# Altium PCB ArduinoUnoR3.PcbDoc
Units mm, origin at the board's own origin, x right, y up, seen from the top; angles counter-clockwise.
Board outline 97.25 x 59.77 mm, 2 copper layers (Top Layer, Bottom Layer); 51 components, 48 nets, 190 pads, 36 vias.
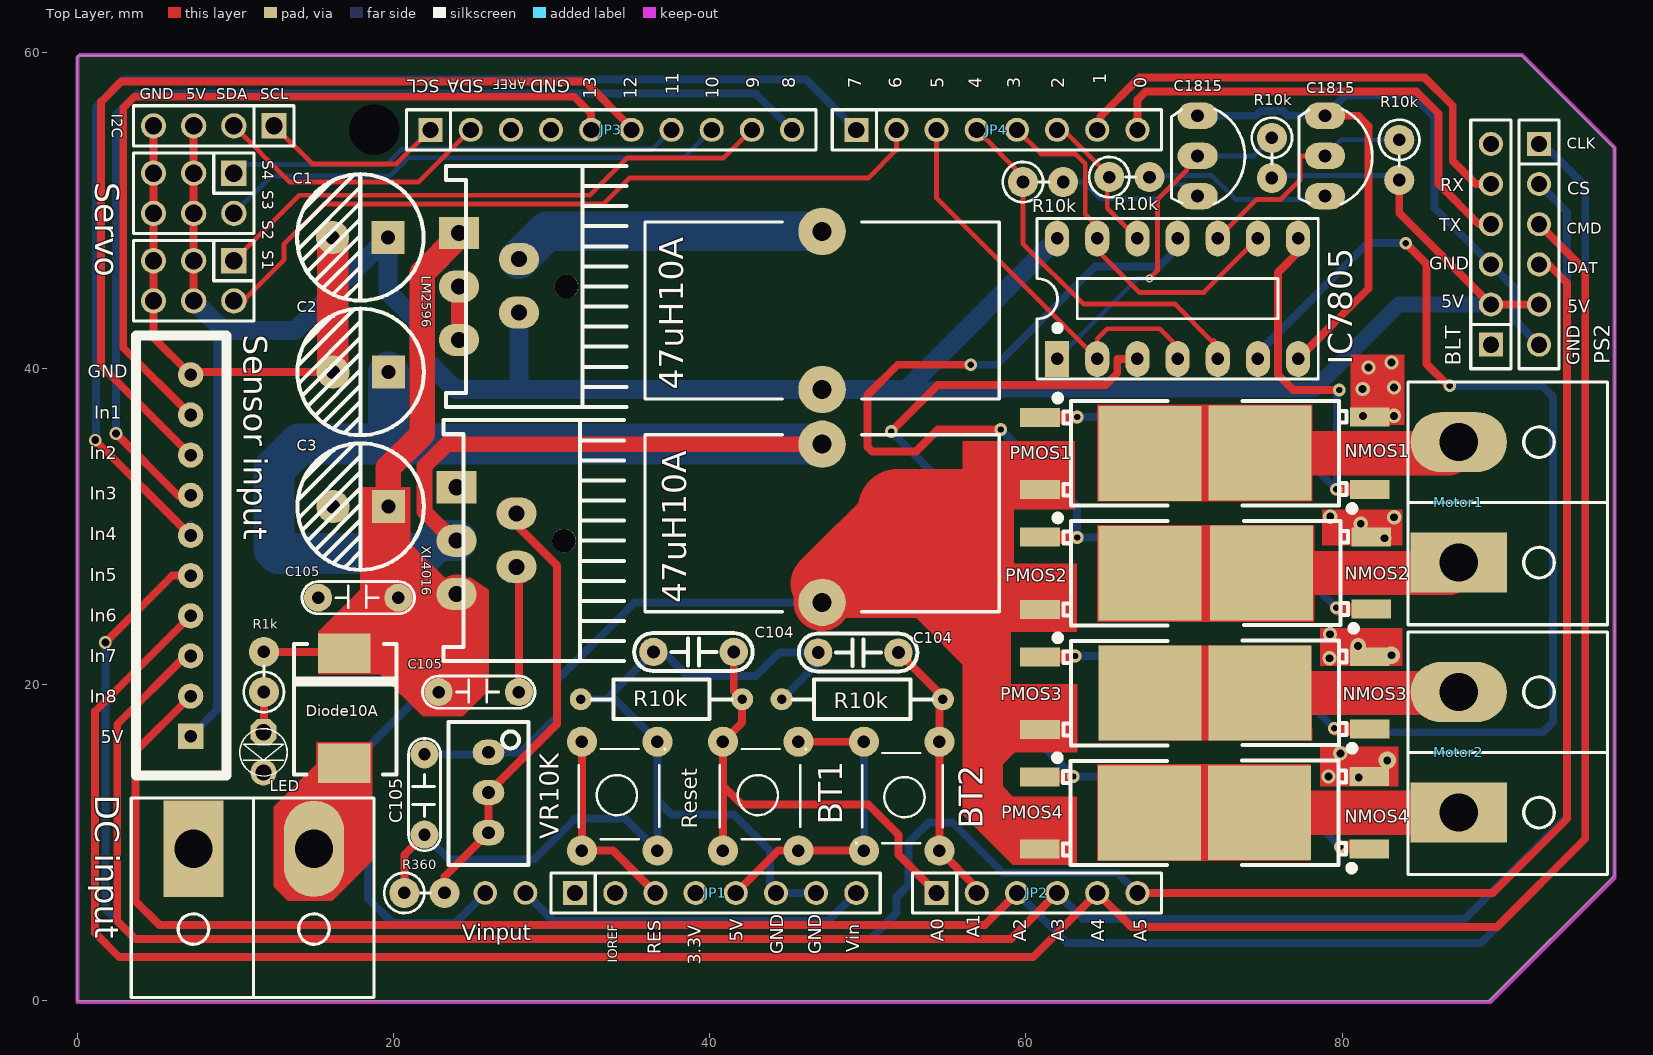
[diagram p0: Top Layer view]
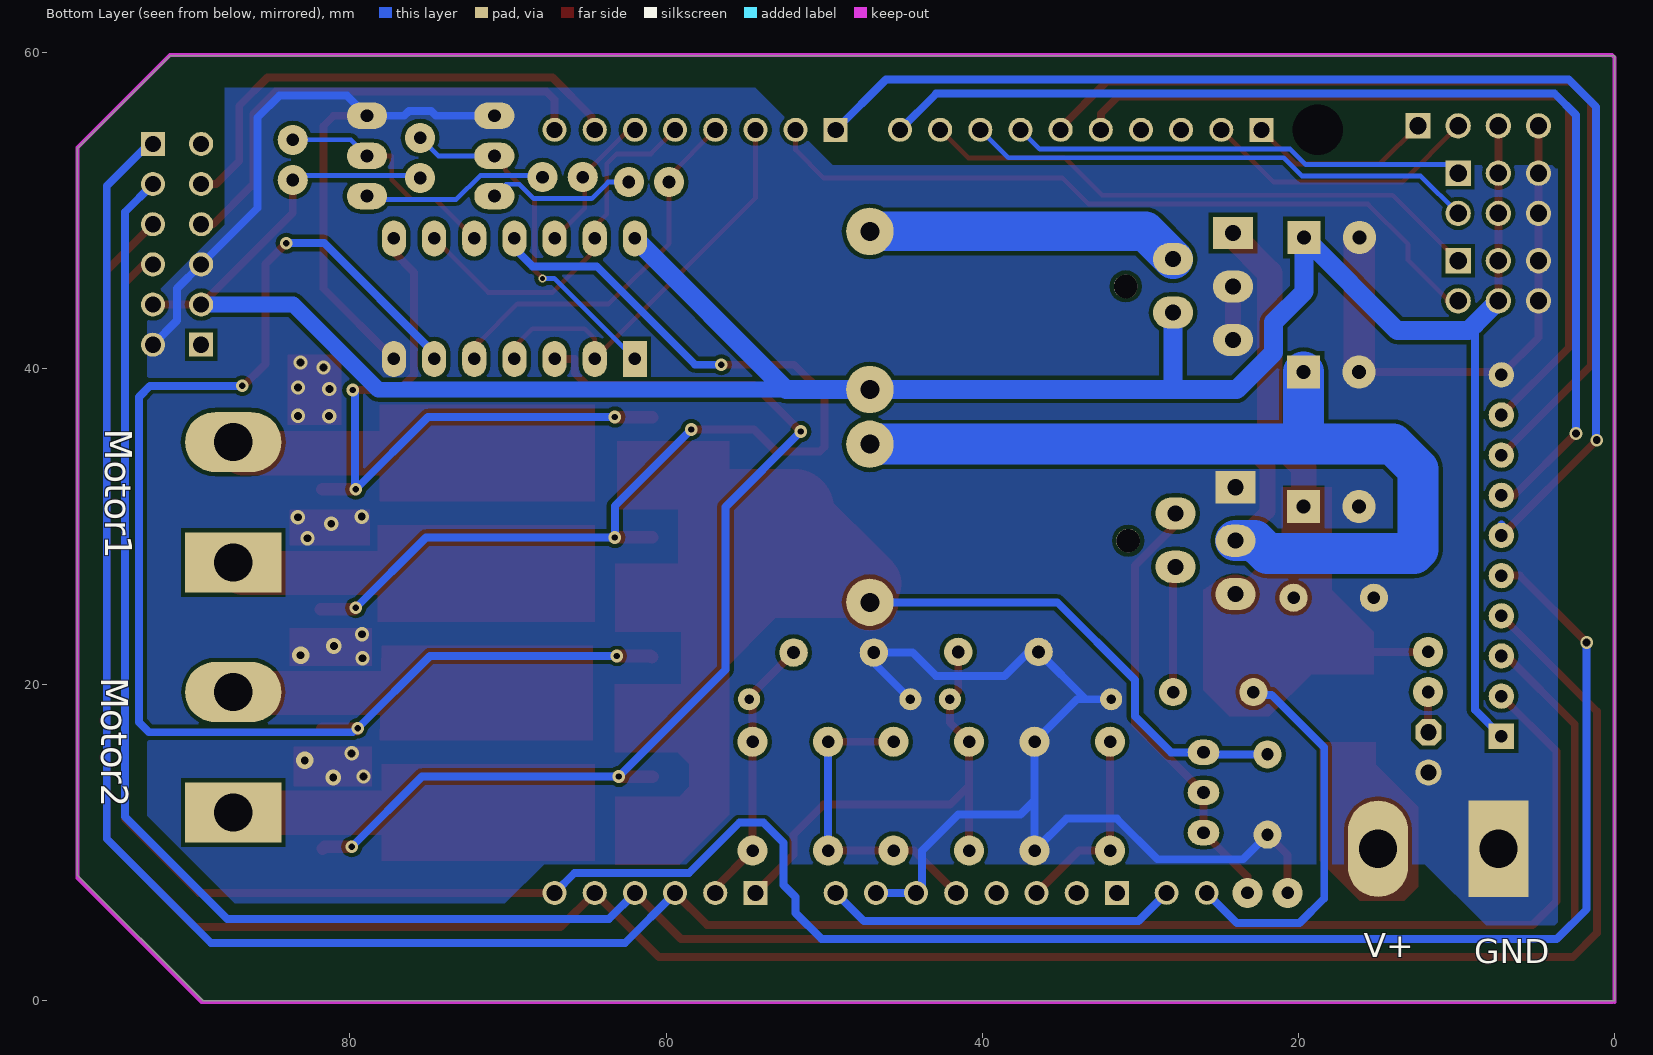
[diagram p1: Bottom Layer view, seen from below]
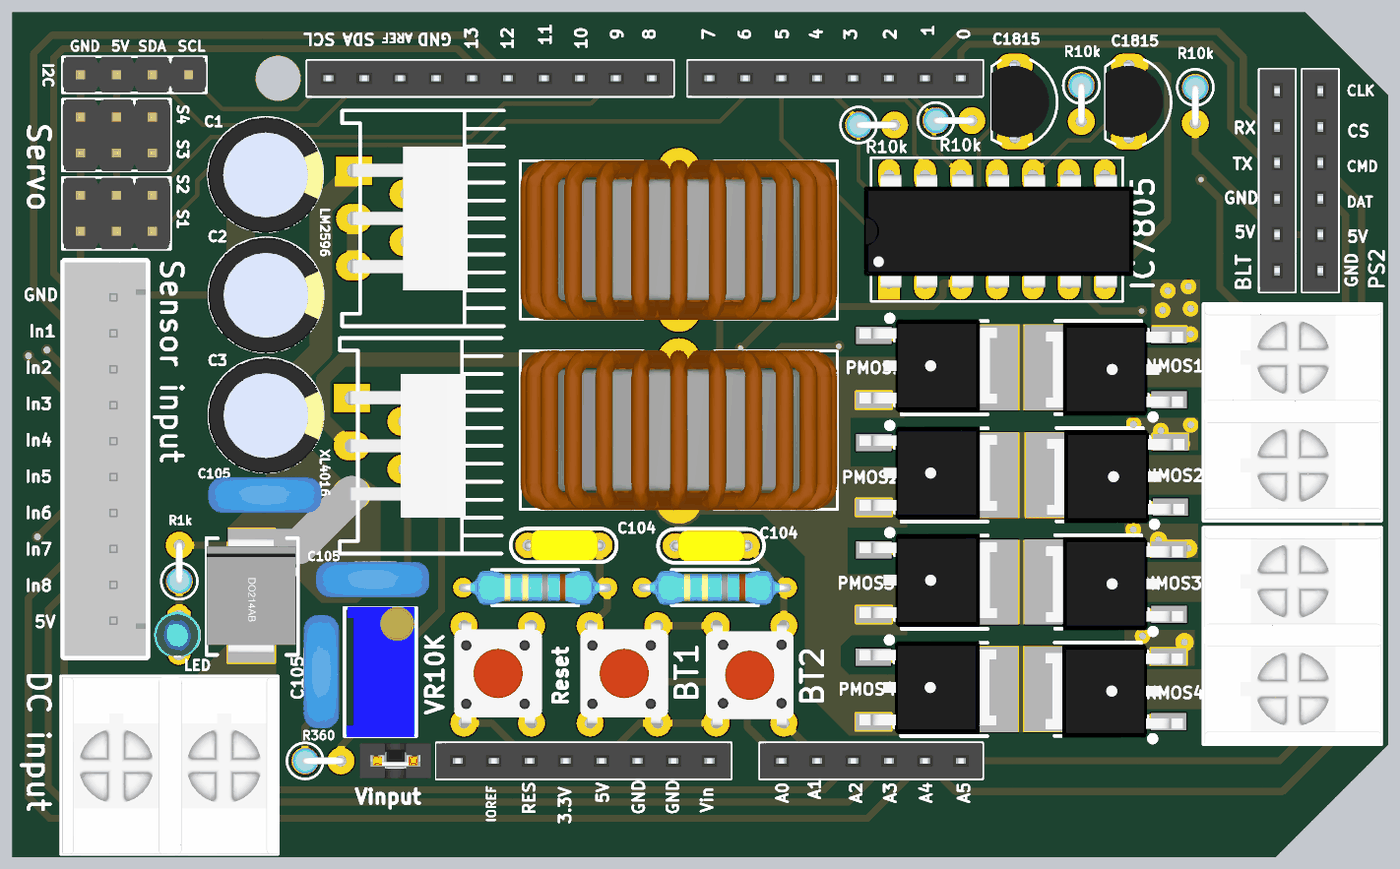
[diagram p2: 3D render of the assembled board from above, using the file's embedded part models]

## Layer stack, top to bottom
Top Solder: solder mask 0.0102, Solder Resist, Dk 3.5
Top Layer: signal copper 0.0356
Dielectric 1: dielectric 0.32, FR-4, Dk 4.8
Bottom Layer: signal copper 0.0356
Bottom Solder: solder mask 0.0102, Solder Resist, Dk 3.5

## Board outline
-0.001,0.007 89.275,0.007 97.252,7.984 97.252,53.894 91.372,59.774 -0.001,59.774

## Design rules (kind name [scope] priority, off if disabled: settings)
Clearance Clearance_1 [All] p1: gap=0.254 ignorepadtopadclearanceinfootprint=FALSE except(0: Arc-Text Arc-Hole Track-Text Track-Hole SMDPad-Text SMDPad-Hole THPad-Text THPad-Hole Via-Text Via-Hole Fill-Text Fill-Hole Poly-Text Poly-Hole Region-Text Region-Hole Text-Text Text-Hole)
Clearance [InNet('GND')] p2: gap=0.6 ignorepadtopadclearanceinfootprint=FALSE
HoleSize [All] p1: absolutevalues=TRUE maxlimit=5 minlimit=0.025 maxpercent=80.000 minpercent=20.000
PlaneClearance [All] p1: clearance=0.8
PlaneConnect [All] p1: planeconnectstyle=Direct reliefexpansion=0.508 reliefentries=4 reliefconductorwidth=0.254 reliefairgap=0.254
PolygonConnect [All] p1: thpad.connectstyle=Direct thpad.reliefconductorwidth=0.254 thpad.reliefentries=4 thpad.polygonreliefangle="90 Angle" thpad.airgapwidth=0.254 smdpad.connectstyle=Relief smdpad.reliefconductorwidth=0.254 smdpad.reliefentries=4 smdpad.polygonreliefangle="90 Angle" smdpad.airgapwidth=0.254 via.connectstyle=Direct via.reliefconductorwidth=0.254 via.reliefentries=4 via.polygonreliefangle="90 Angle" via.airgapwidth=0.254
RoutingVias [All] p1: holewidth=0.4 width=0.7 viastyle="Through Hole" minholewidth=0.3 minwidth=0.5 maxholewidth=0.5 maxwidth=1.27
SilkToSilkClearance [All] p1 off: silktosilkclearance=0.254
SilkToSolderMaskClearance [IsPad] p1 off: minsilkscreentomaskgap=0.254 clearancetoexposedcopper=TRUE
SolderMaskExpansion [All] p1: expansion=0.102 istentingtop=FALSE
Width [All] p1: maxlimit=5 minlimit=0.3 preferedwidth=1
25 further rules are at their usual default settings.

## Classes and differential pairs
component class Sheet1: 47uH10A BLT BT1 BT2 C1 C2 C3 "DC input" I2C JP1 JP2 JP3 JP4 LED LM2596 Motor1 Motor2 PS2 Reset "Sensor input" Servo Vinput XL4016

## Components (designator, comment, footprint, x,y, rotation, side; value= is the part's Value field where it differs from the comment)
47uH10A "47uH 10x20mm (10A)" IND-20x10mm_TH 47.116,48.667 r270 top value=33uH (schematic designator L2)
47uH10A "47uH 10x20mm (10A)" IND-20x10mm_TH 47.116,35.21 r270 top value=33uH (schematic designator L1)
BLT "JP 1x6 2.54" "JP 1x6 CT" 89.407,41.503 r90 top
BT1 "BT" SW4 40.639,9.84 r90 top (schematic designator Button2)
BT2 "BT" SW4 54.736,16.063 r270 top (schematic designator Button1)
C1 "8mm220uf35v" "tu hoa 8mm" 17.906,48.285 r180 top (schematic designator C8)
C2 "8mm220uf35v" "tu hoa 8mm" 17.934,39.777 r180 top (schematic designator C5)
C3 "8mm22uf35v" "tu hoa 8mm" 17.934,31.269 r180 top (schematic designator C7)
C104 "100nF" "tu tantalum dip5.08" 38.988,22.072 r180 top (schematic designator C2)
C104 "100nF" "tu tantalum dip5.08" 49.402,22.032 r180 top (schematic designator C1)
C105 "105" CN2 15.239,25.501 r0 top value=0.1uF (schematic designator C6)
C105 "105" CN2 21.97,10.515 r90 top value=0.1uF (schematic designator C4)
C105 "105" CN2 22.859,19.532 r0 top value=0.1uF (schematic designator C3)
C1815 "C1815" QTO-92 70.865,53.441 r270 top (schematic designator Q2)
C1815 "C1815" QTO-92 78.92,53.441 r270 top (schematic designator Q1)
"DC input" "CON 2 KF7.62" "CON 2 KF7.62" 7.405,9.626 r0 top
Diode10A "DO214ABSMC 10A" DIODE_DO214AB_SMC 16.892,18.516 r90 top value=40V/5A (schematic designator D1)
I2C "JP 1x4 2.54" "JP 1x4 DT" 12.451,55.342 r180 top (schematic designator "I2C input")
IC7805 "7408" DIP14/W0.3 61.975,40.601 r0 top (schematic designator IC1)
JP1 "power" "JP 1x8 CT" 31.495,6.832 r0 top locked
JP2 "Analog pin" "JP 1x6 CT" 54.355,6.832 r0 top locked
JP3 "Digital 2" "JP 1x10 CT" 22.351,55.092 r0 top locked
JP4 "Digital 1" "JP 1x8 CT" 49.275,55.092 r0 top locked
LED "LED 3mm" LED-3MM-GREEN 11.787,16.992 r270 top (schematic designator Led2)
LM2596 "LM2576T-5.0" LM2576t 28.397,45.211 r270 top (schematic designator U2)
Motor1 "CON 2 KF7.62" "CON 2 KF7.62" 87.375,27.772 r90 top
Motor2 "CON 2 KF7.62" "CON 2 KF7.62" 87.375,11.963 r90 top
NMOS1 "IRLR2908" TO-252-3_L6.6-W6.1-P4.57-LS9.9-BR-CW 77.277,34.508 r0 top (schematic designator N-mosfet1)
NMOS2 "IRLR2908" TO-252-3_L6.6-W6.1-P4.57-LS9.9-BR-CW 77.377,26.927 r0 top (schematic designator N-mosfet2)
NMOS3 "IRLR2908" TO-252-3_L6.6-W6.1-P4.57-LS9.9-BR-CW 77.277,19.346 r0 top (schematic designator N-mosfet4)
NMOS4 "IRLR2908" TO-252-3_L6.6-W6.1-P4.57-LS9.9-BR-CW 77.25,11.764 r0 top (schematic designator N-mosfet3)
PMOS1 "STD10PF06" TO-252-3_L6.6-W6.1-P4.57-LS9.9-BR-CW 65.37,34.763 r180 top (schematic designator P-mosfet1)
PMOS2 "STD10PF06" TO-252-3_L6.6-W6.1-P4.57-LS9.9-BR-CW 65.37,27.182 r180 top (schematic designator P-mosfet2)
PMOS3 "STD10PF06" TO-252-3_L6.6-W6.1-P4.57-LS9.9-BR-CW 65.37,19.601 r180 top (schematic designator P-mosfet4)
PMOS4 "STD10PF06" TO-252-3_L6.6-W6.1-P4.57-LS9.9-BR-CW 65.342,12.019 r180 top (schematic designator P-mosfet3)
PS2 "JP 1x6 2.54" "JP 1x6 CT" 92.455,54.203 r270 top (schematic designator PS1)
R1k "10k" R1/4W1 11.81,19.538 r90 top value="R1/4W - 1K" (schematic designator R10)
R10k "10k" R1/4W1 65.277,52.102 r0 top value="R1/4W - 1K" (schematic designator R8)
R10k "10k" R1/4W1 59.816,51.79 r0 top value="R1/4W - 1K" (schematic designator R9)
R10k "10k" R1/4W1 83.614,54.457 r270 top value="R1/4W - 1K" (schematic designator R6)
R10k "10k" R1/4W1 75.56,54.584 r270 top value="R1/4W - 1K" (schematic designator R4)
R10k "10k" "tro vach 1/4w" 36.956,19.079 r0 top (schematic designator R2)
R10k "10k" "tro vach 1/4w" 49.656,19.079 r0 top (schematic designator R1)
R360 "360R" R1/4W1 20.693,6.832 r0 top (schematic designator R7)
Reset "BT" SW4 31.724,9.84 r90 top (schematic designator ButtonReset)
"S4  S3  S2  S1" "" "JP 2x3 DT" 7.371,51.078 r180 top (schematic designator "Servo Output1")
"Sensor input" "Header 10P 2.54 Duc Thang" XH2.54M-10 7.18,16.738 r90 top
Servo "" "JP 2x3 DT" 7.371,45.543 r180 top (schematic designator "Servo Output")
Vinput "Jumper" Jumper 28.351,6.832 r180 top
VR10K "10K" "Bien Tro Vi Chinh Dung" 26.015,13.182 r270 top (schematic designator T1)
XL4016 "XL4016" LM2576t 28.243,29.133 r270 top (schematic designator U1)

## Footprints (in the part's own frame and the unit in brackets; to place one, negate y for a bottom-side part, rotate by r counter-clockwise, add the part's x,y. Pads: shape width x height; smd on the part's side, far side on the other; paste and mask are expansions set on the pad)
"Bien Tro Vi Chinh Dung" [mm] "Bien tro vi chinh"
  oval 1.6x2 hole 0.8: 1(-2.54,0) 2(0,0) 3(2.54,0)
  silkscreen extent -4.47,-2.54 4.6,2.54, body extent -4.54,-2.4 4.66,2.4, height 12.02
CN2 [mil]
  round 70 hole 31: 1(0,0) 2(200,0)
  silkscreen extent -40,-40 240,40, body extent -54,-44 260,55, height 407
"CON 2 KF7.62" [mil]
  rect 150x240 hole 95: 1(-2,0)
  oval 150x240 hole 95: 2(298,0)
  silkscreen extent -157,-370 448,126, body extent -152,-370 448,122, height 493
DIODE_DO214AB_SMC [mm] "DIODE_DO214AB_SMC Type"
  rect 2.5x3.3 smd: 1(-3.498,0) 2(3.473,0)
  silkscreen extent -4.19,-3.3 4.06,3.18, body extent -4.06,-3.15 4.06,3.15, height 2.67
DIP14/W0.3 [mil] "14PIN, W 300mil, Pin to pin 100mil"
  rect 60x90 hole 31: 1(0,0)
  oval 60x90 hole 31: 2(100,0) 3(200,0) 4(300,0) 5(400,0) 6(500,0) 7(600,0) 8(600,300) 9(500,300) 10(400,300) 11(300,300) 12(200,300) 13(100,300) 14(0,300)
  silkscreen extent -50,-50 650,350, body extent -70,-12 680,302, height 145
IND-20x10mm_TH [mm]
  round 3 hole 1.2: 1(0,0) 2(10,0)
  silkscreen extent -0.6,-11.2 10.6,11.2, body extent -0.66,-11.21 10.66,11.21, height 23.04
"JP 1x4 DT" [mm] "4 pins, 1 row, straight, gold plating"
  rect 1.6x1.6 hole 1.1: 1(0,0)
  round 1.6 hole 1.1: 2(2.54,0) 3(5.08,0) 4(7.62,0)
  silkscreen extent -1.27,-1.27 8.89,1.27, body extent -1.27,-1.27 8.89,1.27, height 8.54
"JP 1x6 CT" [mm] "6 row, straight, gold plating"
  rect 1.52x1.52 hole 1.02: 1(0,0)
  round 1.52 hole 1.02: 2(2.54,0) 3(5.08,0) 4(7.62,0) 5(10.16,0) 6(12.7,0)
  silkscreen extent -1.52,-1.27 14.22,1.27, body extent -1.52,-1.25 14.22,1.25, height 8.51
"JP 1x8 CT" [mm] "8 row, straight, gold plating"
  rect 1.52x1.52 hole 1.02: 1(0,0)
  round 1.52 hole 1.02: 2(2.54,0) 3(5.08,0) 4(7.62,0) 5(10.16,0) 6(12.7,0) 7(15.24,0) 8(17.78,0)
  silkscreen extent -1.52,-1.27 19.3,1.27, body extent -1.52,-1.25 19.3,1.25, height 8.51
"JP 1x10 CT" [mm] "10 row, straight, gold plating"
  rect 1.52x1.52 hole 1.02: 1(0,0)
  round 1.52 hole 1.02: 2(2.54,0) 3(5.08,0) 4(7.62,0) 5(10.16,0) 6(12.7,0) 7(15.24,0) 8(17.78,0) 9(20.32,0) 10(22.86,0)
  silkscreen extent -1.52,-1.27 24.38,1.27, body extent -1.52,-1.25 24.38,1.25, height 8.51
"JP 2x3 DT" [mm]
  rect 1.6x1.6 hole 1.1: 1(-2.54,-1.27)
  round 1.6 hole 1.1: 2(0,-1.27) 3(2.54,-1.27) 4(2.54,1.27) 5(0,1.27) 6(-2.54,1.27)
  silkscreen extent -3.81,-2.54 3.81,2.54, body extent -3.81,-2.54 3.81,2.54, height 8.55
Jumper [mm]
  round 1.5 hole 1: 1(0,0) 2(2.54,0)
  body extent -1.27,-1.27 3.81,1.27, height 8.89
LED-3MM-GREEN [mil]
  oct 65x65 hole 40: 1(0,0)
  round 65 hole 40: 2(100,0)
  silkscreen extent -9,-59 109,59, body extent -15,-70 112,60, height 182
LM2576t [mil]
  rect 80x100 hole 40: 1(-132,-167.09)
  oval 80x100 hole 40: 2(-67,-18) 3(1,-167) 4(66,-18) 5(134,-167)
  round 59.06 hole 59.06: ""(1,100)
  silkscreen extent -299,-200 301,250, body extent -199,-175 201,150, height 859
QTO-92 [mil] "TO-92"
  oval 66x100 hole 32: 1(-100,0) 2(0,0) 3(100,0)
  silkscreen extent -117,-65 120,118, body extent -109,-66 109,95, height 245
R1/4W1 [mm] "R 1/4W, 2 Pin, 150mil"
  round 1.905 hole 0.8: 1(0,0) 2(2.54,0)
  silkscreen extent -1.28,-1.28 1.65,1.27, body extent -0.89,-0.92 2.82,0.92, height 7.3
SW4 [mil] "SW button 4pin, 250 x250 mil"
  round 75 hole 31: 1(-13,-8) 1(258,-8) 2(-13,-196) 2(258,-196)
  silkscreen extent 15,-215 240,0, body extent -31,-225 281,19, height 276
TO-252-3_L6.6-W6.1-P4.57-LS9.9-BR-CW [mm]
  rect 2.5x1.2 smd: 1(4.475,-2.149) 3(4.475,2.423)
  rect 6.5x6 smd: 2(-2.475,0.137)
  silkscreen extent -3.57,-3.56 3.55,3.44, body extent -4.23,-3.29 5.47,3.29, height 2.32
"tro vach 1/4w" [mm]
  round 1.4 hole 0.6: 1(-5.1,0) 2(5.1,0)
  silkscreen extent -4.39,-1.25 4.42,1.25, body extent -5.38,-1.2 5.38,1.2, height 2.41
"tu hoa 8mm" [mm]
  rect 2.1x2.1 hole 0.9: 1(-1.75,0)
  round 2.1 hole 0.9: 2(1.75,0)
  silkscreen extent -4,-4 4,4, body extent -4.1,-4.07 4.1,4.13, height 13.81
"tu tantalum dip5.08" [mm]
  round 1.8 hole 0.8: 1(-2.54,0) 2(2.54,0)
  silkscreen extent -3.74,-1.2 3.76,1.2, body extent -2.82,-1.08 2.77,1.08, height 6.27
XH2.54M-10 [mm]
  rect 1.6x1.6 hole 0.8: 1(0,0)
  round 1.6 hole 0.8: 2(2.54,0) 3(5.08,0) 4(7.62,0) 5(10.16,0) 6(12.7,0) 7(15.24,0) 8(17.78,0) 9(20.32,0) 10(22.86,0)
  silkscreen extent -2.48,-2.26 25.34,3.46, body extent -2.48,-2.26 25.34,3.48, height 6.91

## Part data
47uH10A 47uH10A: library part IND_33uH_10A, "FIXED IND 33UH 10A 7 MOHM 20x10mm", Category=INDUCTOR, ComponentLink1Description="MFR Link", ComponentLink1URL=https://item.taobao.com/item.htm?spm=a230r.1.14.40.67d1582cjSsbUh&id=591345290045, MPN=IND_33uH_10A, PinCount=2
BLT: library part "JP 1x6 2.54 Cai Thang", "Cắm", Chung_Loai=Cắm, Don_Vi=Con, Ma_Hang=MH004006, Ten_Linh_Kien="Jump Đơn Cái 2.54MM 1x20P Thẳng"
BT1 BT2 Reset: library part BUTTON
C1 C2 C3: library part "Tu Hoa 1000uF 25V 13x21", "Cắm", Chung_Loai=Cắm, Don_Vi=Con, Ma_Hang=MH002315, So_Chan=2, Ten_Linh_Kien="Tụ Hóa 1000uF 25V 13x21MM"
C104 C104: library part "Tu tantalum 100nF 50V 20% DIP5.08", "Cắm", Chung_Loai=Cắm, Don_Vi=Con, Ma_Hang=MH003955, So_Chan=2, Ten_Linh_Kien="Tụ tantalum 104-100nF 50V 20% DIP5.08 (sứ vàng)(10PCS)"
C105 C105 C105: library part CN2, "Cap np 104 => 105pF"
C1815 C1815: "NPN 600mW, ECB"
"DC input" Motor1 Motor2 "Sensor input": "Cắm", Chung_Loai=Cắm, Don_Vi=Con
  "DC input" Motor1 Motor2: Ma_Hang=MH002053, Ten_Linh_Kien="CON 2 KF7.62-2P 7.62MM (Đen Thẳng)"
  "Sensor input": Ma_Hang=MH001286, Ten_Linh_Kien="Header 10P XH2.54-10P Đực Thẳng"
Diode10A: library part B540C-13-F, "DIODE SCHOTTKY 40V 5A SMC", CompanyID=VT-00370, MPN=B540C-13-F, Solder=SMT
I2C: library part "JP 1x4 2.54 Duc Thang", "Cắm", Chung_Loai=Cắm, Don_Vi=Con, Ma_Hang=MH000903, Ten_Linh_Kien="Jump Đơn Đực 2.54MM 1x40P Thẳng 11MM"
IC7805: "Quad 2-Input AND Gate"
JP1 JP4: library part "JP 1x8 2.54 Duc Thang", "Cắm", Chung_Loai=Cắm, Don_Vi=Con, Ma_Hang=MH000903, Ten_Linh_Kien="Jump Đơn Đực 2.54MM 1x40P Thẳng 11MM"
JP2: library part "JP 1x6 2.54 Duc Thang", "Cắm", Chung_Loai=Cắm, Don_Vi=Con, Ma_Hang=MH000903, Ten_Linh_Kien="Jump Đơn Đực 2.54MM 1x40P Thẳng 11MM"
JP3: library part "JP 1x10 2.54 Duc Thang", "Cắm", Chung_Loai=Cắm, Don_Vi=Con, Ma_Hang=MH000903, Ten_Linh_Kien="Jump Đơn Đực 2.54MM 1x40P Thẳng 11MM"
LED: library part "LED 3mm Xanh La", "Cắm", Chung_Loai=Cắm, Don_Vi=Con, Ma_Hang=MH001054, Ten_Linh_Kien="Led 3MM Phủ Xanh (10c)"
LM2596: "SIMPLE SWITCHER; 3A Step-Down Voltage Regulator", DigiKeyPartNumber=LM2576T-5.0-ND, Manufacturer="National Semiconductor", PackageTopMarking="NSUZXYTT*LM2576T*-5.0 P+", PowerWise=N, Code_JEDEC=TO-220-AB, ComponentLink1Description="LM2576 Datasheet", ComponentLink1URL=http://www.national.com/ds/LM/LM2576.pdf, ComponentLink2Description="LM2576 Web Page", ComponentLink2URL=http://www.national.com/pf/LM/LM2576.html, ComponentLink3Description="T05A Package Page", ComponentLink3URL=http://www.national.com/packaging/folders/t05a.html, CompType=Switcher, DatasheetVersion=Aug-2004, FirstPublished=4-Dec-2008, PackageDescription="TO-220, Molded, 5 Lead, Straight", PackageReference=T05A, PackageVersion="revJ, Jan-1992", PartNumber=LM2576T-5.0, PinCount=5, Publisher="Altium Limited", RoHS=O
NMOS1 NMOS2 NMOS3 NMOS4: library part "IRF3709S SMD", "N-Channel Power MOSFET"
PMOS1 PMOS2 PMOS3 PMOS4: library part "AO D409", "P-Channel Power MOSFET", ComponentLink1Description="Manufacturer Link", ComponentLink1URL=http://www.irf.com/, ComponentLink2Description=Datasheet, ComponentLink2URL=http://www.irf.com/product-info/datasheets/data/irf9540.pdf, DatasheetVersion=PD-9.421C, LatestRevisionDate=17-Jul-2002, LatestRevisionNote="Re-released for DXP Platform.", Note="Pin 2 is electrically connected to pin 4.", PackageDescription="TO, Thru-Hole, Vertical, Heatsink Mounted; 3 In-Line Leads; Pitch 2.54 mm", PackageReference=TO-220AB, PackageVersion=Feb-1997, Published=8-Jun-2000, Publisher="Altium Limited"
PS2: library part "JP 1x6 2.54 Cai Cong", "Cắm", Chung_Loai=Cắm, Don_Vi=Con, Ma_Hang=MH001265, Ten_Linh_Kien="Jump Đơn Cái 2.54MM 1x40P Cong"
R1k R10k R10k R10k R10k: library part R1/4W, "Resistor 1/4W"
R10k R10k: library part "Tro Vach 1/4W 5% 10k", "Căm", Chung_Loai=Cắm, Don_Vi=Con, Ma_Hang=MH007354, So_Chan=2, Ten_Linh_Kien="Trở Vạch 1/4w 5% 10K"
R360: library part "Tro Vach 1/4W 1% 360R", "Cắm", Chung_Loai=Cắm, Don_Vi=Con, Ma_Hang=MH008835, So_Chan=2, Ten_Linh_Kien="Trở Vạch 1/4W 1% 360R"
"S4  S3  S2  S1" Servo: library part "JP 2x3 2.54 Duc Thang", "Cắm", Chung_Loai=Cắm, Don_Vi=Con, Ma_Hang=MH002686, Ten_Linh_Kien="Jump Đôi Đực 2.54MM 2x40P Thẳng 11MM"
Vinput: library part CMP-002-00080-4, "Oreki", Component Type=Connectors, Pins=2
VR10K: library part "Bien Tro Tinh Chinh 10K Dung", "Cắm", Chung_Loai=Cắm, Don_Vi=Con, Ma_Hang=MH003232, Ten_Linh_Kien="Biến Trở VR 103-10K 3296W"
XL4016: library part LM2576T-5.0, "SIMPLE SWITCHER; 3A Step-Down Voltage Regulator", DigiKeyPartNumber=LM2576T-5.0-ND, Manufacturer="National Semiconductor", PackageTopMarking="NSUZXYTT*LM2576T*-5.0 P+", PowerWise=N, Code_JEDEC=TO-220-AB, ComponentLink1Description="LM2576 Datasheet", ComponentLink1URL=http://www.national.com/ds/LM/LM2576.pdf, ComponentLink2Description="LM2576 Web Page", ComponentLink2URL=http://www.national.com/pf/LM/LM2576.html, ComponentLink3Description="T05A Package Page", ComponentLink3URL=http://www.national.com/packaging/folders/t05a.html, CompType=Switcher, DatasheetVersion=Aug-2004, FirstPublished=4-Dec-2008, PackageDescription="TO-220, Molded, 5 Lead, Straight", PackageReference=T05A, PackageVersion="revJ, Jan-1992", PartNumber=LM2576T-5.0, PinCount=5, Publisher="Altium Limited", RoHS=O

## Free pads (board coordinates)
  round 1.524 hole 3.175: 3(18.795,55.092)

## Via types
v1: diameter 0.9, hole 0.5, Top Layer to Bottom Layer, 14 vias
v2: diameter 0.8, hole 0.4, Top Layer to Bottom Layer, tented both sides, 14 vias
v3: diameter 0.8, hole 0.5, Top Layer to Bottom Layer, tented both sides, 3 vias
v4: diameter 1, hole 0.5, Top Layer to Bottom Layer, 2 vias
v5: diameter 1.1, hole 0.5, Top Layer to Bottom Layer, 2 vias
v6: diameter 0.5, hole 0.3, Top Layer to Bottom Layer, tented both sides, 1 vias

## Nets (pads, with @x,y where several pads share a name; then routed paths per layer and width w, separated by ;. In a path a pad name is that pad's centre, name@x,y a point inside that pad or via, vN(x,y) a via of type N, cw(c..) or ccw(c..) an arc to the next point about the centre after c; other vN are vias at no path point)
+5: BT1.2 BT2.2 JP1.5 | length 20.2
  Top Layer w0.5: JP1.5 44.334,9.51 45.618,9.51 BT2.2@49.758,9.51 ; BT1.2@45.618,16.393 BT2.2@49.758,16.393
  Bottom Layer w0.5: BT2.2@49.758,9.51 BT2.2@49.758,16.393
Button1: BT1.1 C104.1@41.528,22.072 JP2.1 R10k.2@42.056,19.079 | length 30.3
  Top Layer w0.5: BT1.1@40.843,9.51 40.843,13.614 ; C104.1@41.528,22.072 41.528,19.607 42.056,19.079 42.056,17.607 40.843,16.393 40.843,13.614 ; JP2.1 51.942,9.245 51.942,10.515 50.037,12.42 42.036,12.42 40.843,13.614
Button2: BT2.1 C104.1@51.942,22.032 JP2.2 R10k.2@54.756,19.079 | length 17.4
  Top Layer w0.5: C104.1@51.942,22.032 54.756,19.218 54.756,19.079 54.533,18.856 54.533,16.393 54.533,9.51 56.895,7.148 JP2.2
GND: "DC input.1" "S4  S3  S2  S1.3" "S4  S3  S2  S1.4" "Sensor input.10" BLT.3 C1.2 C2.2 C3.2 C104.2 C105.1@15.239,25.501 C105.1@21.97,10.515 C1815.1 I2C.4 IC7805.7 JP1.6 JP1.7 LED.2 LM2596.3 LM2596.5 NMOS1.3 NMOS2.3 NMOS3.3 NMOS4.3 PS2.6 R10k.1@31.856,19.079 R10k.1@44.556,19.079 R360.1 Reset.2 Servo.3 Servo.4 XL4016.1 | length 159
  Top Layer w0.5: I2C.4 4.831,52.348 4.831,49.808 Servo.3 Servo.4 4.831,41.946 7.18,39.598 7.359,39.777 C2.2 ; R360.1 20.693,9.237 C105.1@21.97,10.515 ; C104.2@36.448,22.072 C104.2@36.702,21.818 ; IC7805.7 81.66,45.046 81.66,55.346 81.025,55.981 C1815.1@78.92,55.981
  Top Layer w1: LM2596.5 LM2596.3
  Top Layer w2: C1.2 16.156,39.805 C2.2
  Bottom Layer w0.5: C105.1@21.97,10.515 23.522,8.963 28.928,8.963 31.495,11.531 34.682,11.531 36.702,9.51 36.702,12.674 ; R10k.1@31.856,19.079 33.456,19.079 ; R10k.1@44.556,19.079 46.862,21.385 46.862,22.032 44.41,22.032 42.925,20.548 38.607,20.548 37.083,22.072 36.448,22.072 33.456,19.079 ; JP1.7 JP1.6 43.814,7.213 43.814,9.499 41.528,11.785 37.591,11.785 36.702,12.674 ; C1815.1@70.865,55.981 74.55,55.981 74.855,56.286 76.265,56.286 76.571,55.981 78.92,55.981 80.19,57.251 84.454,57.251 85.851,55.854 85.851,50.139 BLT.3 90.931,45.059 90.931,43.027 PS2.6 ; 33.456,19.079 34.017,19.079 36.702,16.393 36.702,12.674
  other v1: 79.139,14.19 79.888,15.661 79.204,21.674 79.232,23.192 82.689,29.259 81.18,30.176 83.293,30.59 79.251,30.628 81.31,36.984 83.282,37.003 81.301,38.693 83.282,38.802 81.673,40.065 83.127,40.374
  other v4: 81.055,14.127 81.016,22.444
  other v5: 82.852,15.218 83.116,21.863
IN1A: IC7805.8 NMOS1.1 PMOS1.1 | length 42.5
  Top Layer w0.5: IC7805.8 77.215,47.345 75.941,46.071 75.941,39.602 76.907,38.636 v2(79.817,38.636)
  Top Layer w0.8: PMOS1.1 63.228,36.913 v2(63.245,36.931) ; v2(79.628,32.359) NMOS1.1
  Bottom Layer w0.5: v2(63.245,36.931) 75.056,36.931 v2(79.628,32.359) 79.686,32.416 79.686,38.424 79.817,38.555 v2(79.817,38.636)
IN1B: IC7805.11 NMOS2.1 PMOS2.1 | length 68.1
  Top Layer w0.5: v2(56.514,40.233) 51.899,40.233 49.991,38.325 49.991,35.044 50.284,34.751 53.052,34.751 54.442,36.141 v2(58.413,36.141)
  Top Layer w0.8: PMOS2.1 63.225,29.332 v2(63.245,29.311) ; v2(79.628,24.866) 79.717,24.777 NMOS2.1
  Bottom Layer w0.5: v2(56.514,40.233) 58.165,40.233 64.388,46.456 68.452,46.456 69.595,47.599 IC7805.11 ; v2(58.413,36.141) 63.245,31.308 v2(63.245,29.311) 75.183,29.311 v2(79.628,24.866)
IN2A: IC7805.3 NMOS4.1 PMOS4.1 | length 67.4
  Top Layer w0.5: v2(51.48,36.009) 54.425,38.954 65.04,38.954 65.781,39.695 65.781,40.601 IC7805.3
  Top Layer w0.8: PMOS4.1 62.963,14.169 v2(62.991,14.198) ; v2(79.882,9.753) 81.587,9.753 NMOS4.1
  Bottom Layer w0.5: v2(51.48,36.009) 56.246,31.243 56.246,20.943 v2(62.991,14.198) 75.437,14.198 v2(79.882,9.753)
IN2B: IC7805.6 NMOS3.1 PMOS3.1 | length 87.2
  Top Layer w0.5: v2(84.015,47.928) 85.344,46.599 85.344,40.286 86.729,38.901 v2(86.81,38.901)
  Top Layer w0.8: PMOS3.1 60.963,21.818 v2(63.118,21.818) ; v2(79.501,17.246) 79.551,17.196 NMOS3.1
  Bottom Layer w0.5: v2(63.118,21.818) 74.929,21.818 v2(79.501,17.246) 79.583,17.246 79.837,16.992 92.709,16.992 93.344,17.627 93.344,38.195 92.638,38.901 v2(86.81,38.901) ; IC7805.6 74.675,40.982 81.622,47.928 v2(84.015,47.928)
M1DIR: IC7805.12 JP4.6 R10k.1@65.277,52.102 | length 9.2
  Top Layer w0.3: JP4.6 62.378,55.092 65.15,52.319 65.15,52.102 65.15,50.126 IC7805.12
M1PWM: IC7805.9 IC7805.13 JP4.5 | length 23.7
  Top Layer w0.3: JP4.5 60.959,53.568 63.118,53.568 63.753,52.933 63.753,49.758 64.515,48.996 IC7805.13 64.515,47.472 67.182,44.805 71.259,44.805 IC7805.9
M2DIR: IC7805.5 JP4.4 R10k.1@59.816,51.79 | length 25.5
  Top Layer w0.3: JP4.4 59.816,52.171 59.816,51.79 59.816,47.895 63.633,44.078 69.416,44.078 71.823,41.671 71.823,41.626 72.135,41.313 IC7805.5 71.901,40.835 71.901,41.75 71.881,41.77
M2PWM: IC7805.2 IC7805.4 JP4.3 | length 26.9
  Top Layer w0.3: JP4.3 54.355,50.761 IC7805.2 64.515,41.884 65.15,42.519 68.452,42.519 69.595,41.376 IC7805.4
  Bottom Layer w0.3: JP4.3@54.122,54.858 JP4.3
NetBLT_4: BLT.4 JP4.8 | length 30.7
  Top Layer w0.5: JP4.8 67.055,56.997 67.563,57.505 84.708,57.505 86.105,56.108 86.105,51.663 88.645,49.123 BLT.4 BLT.4@89.28,48.996
NetBLT_5: BLT.5 JP4.7 | length 31.5
  Top Layer w0.5: JP4.7 64.711,55.287 64.711,55.922 67.182,58.394 85.216,58.394 86.994,56.616 86.994,53.126 88.458,51.663 BLT.5
NetButtonReset_1: JP1.3 Reset.1 | length 12.6
  Top Layer w0.5: Reset.1@31.927,16.393 31.927,9.51 33.897,9.51 JP1.3
NetC3_2: C105.2@27.939,19.532 XL4016.4 | length 8
  Top Layer w0.5: XL4016.4 27.939,27.303 C105.2@27.939,19.532
NetC5_1: 47uH10A.1@47.116,35.21 C2.1 XL4016.3 | length 88.3
  Top Layer w1: XL4016.3 23.825,29.108 21.975,30.958 21.975,33.814 23.371,35.21 47uH10A.1@47.116,35.21
  Bottom Layer w2.6: C2.1 19.684,35.21 ; XL4016.3 22.783,29.108 21.97,28.295 12.699,28.295 12.445,28.549 12.445,33.629 14.027,35.21 19.684,35.21 ; 47uH10A.1@47.116,35.21 19.684,35.21
NetD1_1: "DC input.2" Diode10A.1
"NetI2C input_1": I2C.1 JP3.1 | length 11.8
  Top Layer w0.3: I2C.1 14.86,52.933 20.192,52.933 JP3.1
"NetI2C input_2": I2C.2 JP3.2 | length 17.8
  Top Layer w0.3: I2C.2 13.463,51.79 21.589,51.79 JP3.2
NetIC1_1: C1815.2@70.865,53.441 IC7805.1 R10k.1@75.56,54.584 | length 22.2
  Top Layer w0.3: v6(67.817,45.694) 68.325,46.202 68.325,50.692 70.17,52.537 70.17,52.805 70.806,53.441 C1815.2@70.865,53.441
  Bottom Layer w0.3: IC7805.1 67.068,45.694 v6(67.817,45.694) ; C1815.2@70.865,53.441 74.417,53.441 R10k.1@75.56,54.584
NetIC1_10: C1815.2@78.92,53.441 IC7805.10 R10k.1@83.614,54.457 | length 15
  Top Layer w0.3: IC7805.10 74.602,50.687 76.122,50.687 77.355,51.921 77.355,53.441 C1815.2@78.92,53.441
  Bottom Layer w0.3: C1815.2@78.92,53.441 79.936,54.457 R10k.1@83.614,54.457
NetJP1_8: JP1.8 Vinput.1 | length 22.4
  Bottom Layer w0.5: Vinput.1 30.129,5.054 47.497,5.054 JP1.8
NetJP2_3: "Sensor input.2" JP2.3 PS2.1 | length 156.9
  Top Layer w0.5: 7.18,19.278 3.682,15.781 3.682,6.324 5.206,4.8 57.403,4.8 JP2.3
  Bottom Layer w0.5: JP2.3 62.61,3.657 88.772,3.657 95.376,10.261 95.376,51.536 92.709,54.203 PS2.1
NetJP2_4: "Sensor input.3" JP2.4 PS2.2 | length 156.4
  Top Layer w0.5: 7.18,21.818 6.857,21.818 2.539,17.5 2.539,5.054 3.682,3.911 59.054,3.911 JP2.4
  Bottom Layer w0.5: JP2.4 63.626,5.181 87.756,5.181 94.233,11.658 94.233,49.885 PS2.2
NetJP2_5: "Sensor input.4" JP2.5 PS2.3 | length 162.4
  Top Layer w0.5: 7.18,24.358 1.142,18.321 1.142,4.292 2.666,2.768 60.451,2.768 JP2.5 66.674,4.673 89.788,4.673 95.376,10.261 95.376,46.202 PS2.3
NetJP2_6: "Sensor input.5" JP2.6 PS2.4 | length 162.7
  Top Layer w0.5: v3(1.786,22.673) 6.01,26.898 7.18,26.898 ; JP2.6 89.534,6.832 94.233,11.531 94.233,45.392 93.043,46.583 PS2.4
  Bottom Layer w0.5: v3@1.786,22.58 1.786,5.807 3.682,3.911 50.164,3.911 51.815,5.562 51.815,6.578 52.577,7.34 52.577,10.007 53.847,11.277 55.371,11.277 58.546,8.102 65.785,8.102 JP2.6 ; 6.73,26.898 7.18,26.898
NetJP3_5: "Sensor input.9" JP3.5 | length 52.5
  Top Layer w0.5: 7.18,37.058 2.92,41.317 2.92,56.489 3.615,57.183 31.436,57.183 32.511,56.108 JP3.5
NetJP3_6: "Sensor input.8" JP3.6 | length 60.1
  Top Layer w0.5: 7.18,34.518 1.523,40.174 1.523,56.87 2.793,58.14 32.13,58.14 35.051,55.219 JP3.6
NetJP3_10: "Sensor input.7" JP3.10 | length 70.8
  Top Layer w0.5: v3(2.457,35.889) 6.369,31.978 7.18,31.978
  Bottom Layer w0.5: v3@2.457,36.042 2.457,56.026 3.809,57.378 42.925,57.378 JP3.10 ; 6.984,31.978 7.18,31.978
NetJP4_1: "Sensor input.6" JP4.1 | length 80.2
  Top Layer w0.5: v3(1.15,35.465) 7.177,29.438 7.18,29.438
  Bottom Layer w0.5: v3@1.185,35.696 1.185,56.532 2.92,58.267 46.1,58.267 JP4.1 ; 7.18,29.438 7.18,30.132
NetL2_1: 47uH10A.1@47.116,48.667 LM2596.2 | length 19.9
  Bottom Layer w2.5: LM2596.2 29.694,48.667 47uH10A.1@47.116,48.667
NetLed2_1: LED.1 R1k.1 | length 2.6
  Top Layer w0.5: LED.1 11.81,17.015 R1k.1
NetMotor1_1: Motor1.1 NMOS2.2 PMOS2.2 | length 12.7
  Top Layer w2.8: NMOS2.2 86.779,27.063 Motor1.1@87.375,27.66
NetMotor1_2: Motor1.2 NMOS1.2 PMOS1.2 | length 12.8
  Top Layer w2.8: NMOS1.2 86.74,34.645 Motor1.2@87.375,35.28
NetMotor2_1: Motor2.1 NMOS4.2 PMOS4.2 | length 12.5
  Top Layer w2.8: NMOS4.2 87.198,11.901 Motor2.1@87.248,11.85
NetMotor2_2: Motor2.2 NMOS3.2 PMOS3.2 | length 12.5
  Top Layer w2.8: NMOS3.2 87.237,19.482 Motor2.2@87.248,19.47
NetQ1_3: C1815.3@78.92,50.901 R10k.2@67.817,52.102 | length 11.9
  Bottom Layer w0.3: R10k.2@67.817,52.102 67.914,52.199 71.756,52.199 73.268,50.687 78.706,50.687 C1815.3@78.92,50.901
NetQ2_3: C1815.3@70.865,50.901 R10k.2@62.356,51.79 | length 9.6
  Bottom Layer w0.3: R10k.2@62.356,51.79 63.672,51.79 64.716,50.746 68.379,50.746 69.278,51.645 70.122,51.645 C1815.3@70.865,50.901
NetR7_2: R360.2 VR10K.2 VR10K.3 XL4016.2 | length 28
  Top Layer w0.5: R360.2 23.233,7.86 VR10K.3 VR10K.2 30.352,17.519 30.352,27.533 27.786,30.1 XL4016.2
Servo1: JP4.2 Servo.6 | length 47.7
  Top Layer w0.3: Servo.6@10.517,44.273 13.08,46.837 13.08,47.853 15.62,50.393 33.273,50.393 34.924,52.044 50.037,52.044 51.815,53.822 JP4.2
  Top Layer w0.5: Servo.6 Servo.6@10.517,44.273
Servo2: JP3.9 Servo.1 | length 36.6
  Top Layer w0.3: Servo.1 14.044,50.947 32.43,50.947 34.797,53.314 40.893,53.314 JP3.9
  Bottom Layer w0.5: JP3.9@42.29,55.092 JP3.9
Servo3: "S4  S3  S2  S1.6" JP3.8 | length 32.4
  Bottom Layer w0.3: 9.911,49.808 12.27,52.167 19.784,52.167 20.94,53.323 38.363,53.323 JP3.8
Servo4: "S4  S3  S2  S1.1" JP3.7 | length 28.8
  Bottom Layer w0.3: 9.911,52.348 10.457,52.894 19.558,52.894 20.541,53.877 36.377,53.877 JP3.7
V5V: 47uH10A.2@47.116,38.667 "S4  S3  S2  S1.2" "S4  S3  S2  S1.5" "Sensor input.1" BLT.2 C1.1 I2C.3 IC7805.14 LM2596.4 PS2.5 R10k.2@75.56,52.044 R10k.2@83.614,51.917 Servo.2 Servo.5 | length 172.4
  Top Layer w0.5: Servo.5 Servo.2 7.371,49.808 7.371,52.348 I2C.3 ; R10k.2@83.614,51.917 83.614,49.836 BLT.2 PS2.5
  Bottom Layer w0.3: R10k.2@75.56,52.044 75.718,52.202 78.4,52.202 ccw(c78.488,53.441) 78.488,52.199 83.315,52.199 83.439,52.199 83.527,52.111 83.614,52.023 R10k.2@83.614,51.917
  Bottom Layer w0.5: 7.18,16.738 8.851,18.409 8.851,42.793
  Bottom Layer w1: 52.422,38.667 76.559,38.667 76.568,38.658 78.207,38.658 83.592,44.043 BLT.2
  Bottom Layer w1.2: Servo.5 8.851,42.793 9.253,42.392 13.763,42.392 C1.1 19.656,44.86 21.588,42.928 21.588,40.996 23.917,38.667 27.939,38.667 ; LM2596.4 27.939,38.667 ; IC7805.14 52.422,38.667 47.116,38.667 27.939,38.667
VADJ: 47uH10A.2@47.116,25.21 C105.2@21.97,15.595 PMOS1.3 PMOS2.3 PMOS3.3 PMOS4.3 VR10K.1 | length 44.1
  Top Layer w3.6: 47uH10A.2@47.116,25.21 47uH10A.2@47.116,26.39
  Top Layer w4: 47uH10A.2@47.116,26.39 51.874,31.147 ; 55.809,31.147 57.054,29.901
  Top Layer w5: 51.874,31.147 55.809,31.147
  Bottom Layer w0.5: C105.2@21.97,15.595 25.888,15.595 VR10K.1 28.066,15.722 30.352,18.008 30.352,20.294 35.269,25.21 47uH10A.2@47.116,25.21
VCC: 
Vinput: C3.1 C105.1@22.859,19.532 C105.2@20.319,25.501 Diode10A.2 LM2596.1 R1k.2 Vinput.2 XL4016.5 | length 57.3
  Top Layer w0.5: R1k.2 16.802,22.078 Diode10A.2
  Top Layer w1.6: C3.1 19.684,33.722 21.831,35.868 21.831,46.043 24.153,48.365 LM2596.1
  Top Layer w2.5: Diode10A.2 20.26,21.988 XL4016.5
  Bottom Layer w0.5: C105.1@22.859,19.532 22.687,19.359 21.714,19.359 18.378,16.023 18.378,6.487 19.938,4.927 23.906,4.927 Vinput.2
pads on no net: BLT.1 BLT.6 JP1.1 JP1.2 JP1.4 JP3.3 JP3.4 LM2596. XL4016.

## Polygon pours and split planes (outlines as drawn)
GND on Bottom Layer "GND_L02_P000" (solid, pour order 0): 12.021,8.655 8.142,4.776 3.816,4.776 3.607,4.984 3.607,14.151 3.607,42.483 3.607,52.621 3.746,52.621 3.966,52.841 49.45,52.841 54.369,57.76 87.909,57.76 87.909,49.099 92.831,44.177 92.831,11.712 87.284,6.165 70.202,6.165 67.712,8.655

## Keep-outs
Keep-Out Layer:
  lines w0.254: 0.026,-0.06 0.026,59.66 0.183,59.817 91.383,59.817 97.24,53.96 97.24,7.785 89.396,-0.06 0.183,-0.06

## Other copper
Top Layer:
  rectangle net GND: 78.612,13.563 83.565,16.103
  rectangle net GND: 78.612,21.183 83.819,23.596
  rectangle net GND: 78.739,28.803 83.819,31.089
  rectangle net GND: 80.517,36.423 83.946,40.868
  rectangle net VADJ: 48.132,24.231 56.387,28.93
  rectangle net VADJ: 56.006,17.881 59.054,35.407
  rectangle net VADJ: 59.181,8.61 63.245,12.928
  rectangle net VADJ: 59.181,15.722 63.245,20.04
  rectangle net VADJ: 59.181,23.342 63.245,27.66
  rectangle net VADJ: 59.054,31.089 63.118,35.407
  region net VADJ: 52.741,24.547 56.844,20.445 57.365,20.445 57.365,25.166
  region net VADJ: 59.247,35.407 56.133,32.486 56.133,25.501 58.292,23.342 60.07,23.342 60.07,26.771 59.247,27.594
  region net VADJ: 59.181,8.61 56.006,11.785 56.006,20.04 63.245,20.04 63.245,15.722 59.435,15.722 59.372,15.785 58.546,14.96 58.546,13.563 59.181,12.928 59.308,12.928 60.959,11.277
  region net Vinput: 17.906,32.486 21.081,32.486 21.081,28.93 23.367,26.644 20.319,23.596 17.906,23.596
  region net Vinput: 15.239,23.342 15.239,23.215 15.239,20.675 19.176,20.675 21.843,18.008 24.383,18.008 26.034,19.659 26.034,26.009 24.891,26.771 24.51,26.771 18.668,26.771
  region net NetD1_1: 15.112,16.357 18.668,16.357 18.668,8.864 16.128,6.324 13.334,6.324 12.445,7.213 12.445,12.293 15.112,14.96
  region net NetMotor2_1: 64.515,14.96 77.977,14.96 77.977,8.864 64.515,8.864
  region net NetMotor2_2: 64.642,22.453 77.977,22.453 78.104,16.484 64.642,16.484
  region net NetMotor1_1: 78.231,30.073 78.231,23.977 64.515,23.977 64.515,30.073
  region net NetMotor1_2: 64.515,37.693 78.104,37.693 78.104,31.597 64.515,31.597

## Silkscreen, mask and mechanical layers (free items; w line width, h text height)
Top Overlay:
  text "SCL" at 22.933,58.249 h0.8 r180
  text "SDA" at 25.727,58.249 h0.8 r180
  text "AREF" at 28.394,58.249 h0.6 r180
  text "GND" at 31.188,58.249 h0.8 r180
  text "1" at 65.097,57.983 h0.8 r90
  text "9" at 43.126,57.716 h0.8 r90
  text "8" at 45.412,57.716 h0.8 r90
  text "7" at 49.603,57.716 h0.8 r90
  text "6" at 52.143,57.716 h0.8 r90
  text "5" at 54.81,57.716 h0.8 r90
  text "4" at 57.223,57.716 h0.8 r90
  text "3" at 59.636,57.716 h0.8 r90
  text "2" at 62.43,57.716 h0.8 r90
  text "0" at 67.637,57.716 h0.8 r90
  text "11" at 38.046,57.316 h0.8 r90
  text "13" at 32.839,57.05 h0.8 r90
  text "12" at 35.379,57.05 h0.8 r90
  text "10" at 40.586,57.05 h0.8 r90
  text "GND" at 3.969,57.03 h0.7
  text "5V" at 6.89,57.03 h0.7
  text "SDA" at 8.795,57.03 h0.7
  text "SCL" at 11.589,57.03 h0.7
  text "CLK" at 94.215,53.881 h0.7
  text "RX" at 86.196,51.208 h0.8
  text "CS" at 94.235,50.983 h0.8
  text "TX" at 86.158,48.668 h0.8
  text "CMD" at 94.215,48.531 h0.7
  text "GND" at 85.523,46.255 h0.8
  text "DAT" at 94.215,46.013 h0.7
  text "5V" at 86.285,43.842 h0.8
  text "5V" at 94.235,43.516 h0.8
  text "GND" at 95.034,40.197 h0.8 r90
  text "GND" at 0.681,39.397 h0.8
  text "In1" at 1.081,36.829 h0.8
  text "In2" at 0.814,34.26 h0.8
  text "In3" at 0.814,31.692 h0.8
  text "In4" at 0.814,29.124 h0.8
  text "In5" at 0.814,26.556 h0.8
  text "In6" at 0.814,23.987 h0.8
  text "In7" at 0.814,21.419 h0.8
  text "In8" at 0.814,18.851 h0.8
  text "5V" at 1.481,16.283 h0.8
  text "A1" at 57.096,4.008 h0.8 r90
  text "5V" at 42.11,3.741 h0.8 r90
  text "A0" at 54.81,3.741 h0.8 r90
  text "A2" at 60.017,3.741 h0.8 r90
  text "A3" at 62.43,3.741 h0.8 r90
  text "A4" at 64.97,3.741 h0.8 r90
  text "A5" at 67.637,3.741 h0.8 r90
  text "Vin" at 49.476,3.075 h0.8 r90
  text "RES" at 36.903,2.941 h0.8 r90
  text "GND" at 44.65,2.941 h0.8 r90
  text "GND" at 47.063,2.941 h0.8 r90
  text "IOREF" at 34.149,2.415 h0.6 r90
  text "3.3V" at 39.443,2.275 h0.8 r90
Bottom Overlay:
  text "V+" at 15.874,2.768 h1.52
  text "GND" at 8.889,2.387 h1.52